# Altium PCB MotivPCB.PcbDoc
Units mil, origin at the board's own origin, x right, y up, seen from the top; angles counter-clockwise.
Board outline 994.28 x 797.43 mil, 2 copper layers (Top Layer, Bottom Layer); 10 components, 7 nets, 48 pads, 5 vias.
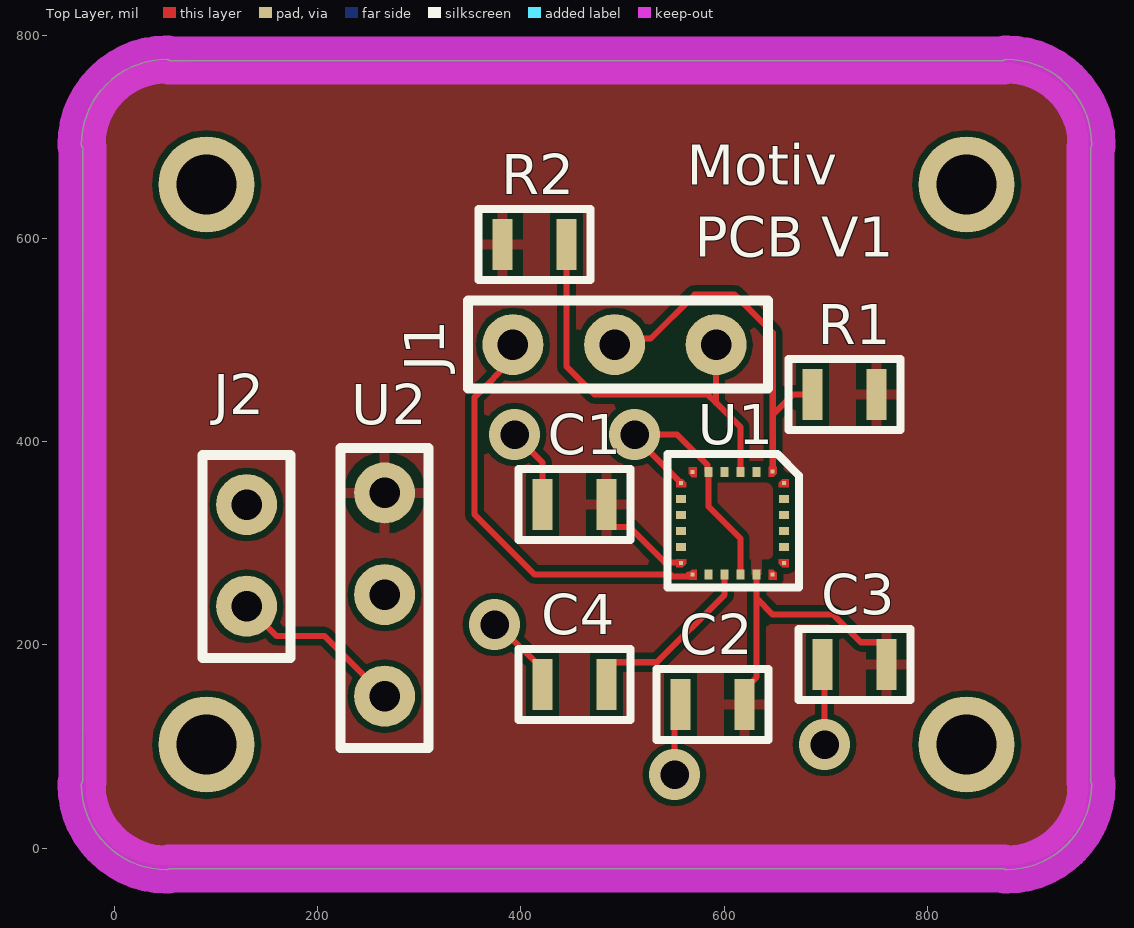
[diagram p0: Top Layer view]
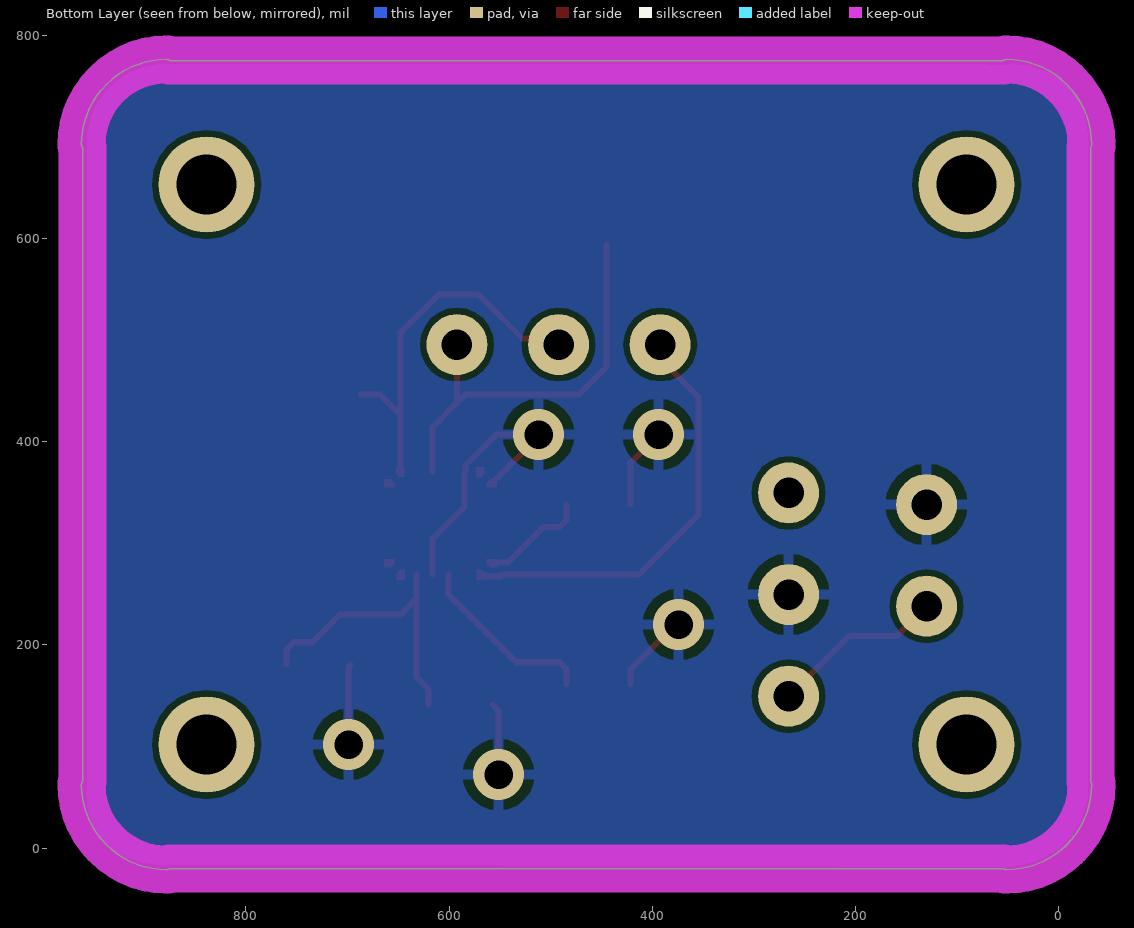
[diagram p1: Bottom Layer view, seen from below]

## Layer stack, top to bottom
Top Solder: solder mask 0.4, Solder Resist, Dk 3.5
Top Layer: signal copper 1.4
Dielectric 1: dielectric 12.6, FR-4, Dk 4.8
Bottom Layer: signal copper 1.4
Bottom Solder: solder mask 0.4, Solder Resist, Dk 3.5

## Board outline
-32.42,62.44 cw(c-27.41,62.44) -31.36,65.53 -31.36,689.28 cw(c-27.41,692.37) -32.42,692.37 cw(c51.33,692.37) 51.33,776.12 cw(c51.33,771.11) 54.42,775.06 875.02,775.06 cw(c878.1,771.11) 878.1,776.12 cw(c878.1,692.37) 961.86,692.37 cw(c956.84,692.37) 960.8,689.28 960.8,65.53 cw(c956.84,62.44) 961.86,62.44 cw(c878.1,62.44) 878.1,-21.31 cw(c878.1,-16.3) 875.02,-20.25 54.42,-20.25 cw(c51.33,-16.3) 51.33,-21.31 cw(c51.33,62.44)

## Design rules (kind name [scope] priority, off if disabled: settings)
Clearance [All] p1: gap=6 ignorepadtopadclearanceinfootprint=FALSE
HoleSize [All] p1: absolutevalues=TRUE maxlimit=3937.01 minlimit=15.75 maxpercent=80.000 minpercent=20.000
PolygonConnect [All] p1: connectstyle=Relief reliefconductorwidth=10 reliefentries=4 polygonreliefangle="90 Angle" airgapwidth=10
RoutingVias [All] p1: holewidth=15.75 width=31.5 viastyle="Through Hole" minholewidth=15.75 minwidth=23.62 maxholewidth=3937.01 maxwidth=3937.01
SilkToSilkClearance [All] p1: silktosilkclearance=0
SilkToSolderMaskClearance [IsPad] p1: minsilkscreentomaskgap=0 clearancetoexposedcopper=TRUE
SolderMaskExpansion [All] p1: expansion=4 istentingtop=FALSE
Width [All] p1: maxlimit=3937.01 minlimit=6 preferedwidth=6
27 further rules are at their usual default settings.

## Components (designator, comment, footprint, x,y, rotation, side; value= is the part's Value field where it differs from the comment)
C1 "100nF" "0805 Passive" 452.91,338.03 r0 top
C2 "100nF" "0805 Passive" 588.73,141.18 r0 top
C3 "470nF" "0805 Passive" 728.5,180.55 r0 top
C4 "1uF" "0805 Passive" 452.91,160.87 r0 top
J1 "Header-3" Header-3 592.28,495.51 r180 top
J2 "Header-2" Header-2 130.07,238.03 r90 top
R1 "4.7k Res" "0805 Passive" 718.65,446.3 r0 top
R2 "4.7k Res" "0805 Passive" 413.54,593.94 r0 top
U1 "IMU" BHI160b 659.01,359.1 r0 top
U2 "V_Reg 3V 0.5A" Header-3 265.9,149.45 r90 top

## Footprints (in the part's own frame and the unit in brackets; to place one, negate y for a bottom-side part, rotate by r counter-clockwise, add the part's x,y. Pads: shape width x height; smd on the part's side, far side on the other; paste and mask are expansions set on the pad)
"0805 Passive" [mm]
  rect 0.5x1.27 smd: 1(-0.8,0) 2(0.8,0)
  silkscreen extent -1.4,-0.89 1.4,0.89
BHI160b [mm]
  rect 0.1x0.1 smd paste+0 mask+0: 1(0,0) 24(-0.285,0.295)
  rect 0.25x0.2 smd paste+0 mask+0.03: 2(0,-0.4) 3(0,-0.8) 4(0,-1.2) 5(0,-1.6) 14(-2.57,-1.6) 15(-2.57,-1.2) 16(-2.57,-0.8) 17(-2.57,-0.4)
  rect 0.1x0.1 smd paste+0 mask+0.03: 6(0,-2) 7(-0.285,-2.285) 12(-2.285,-2.285) 13(-2.57,-2) 18(-2.57,0) 19(-2.285,0.285)
  rect 0.2x0.25 smd paste+0 mask+0.03: 8(-0.685,-2.285) 9(-1.085,-2.285) 10(-1.485,-2.285) 11(-1.885,-2.285) 20(-1.885,0.285) 21(-1.485,0.285) 22(-1.085,0.285) 23(-0.685,0.285)
  Top Layer region: -0.125,0.015 -0.045,0.095 0.125,0.095 0.125,-0.105 -0.125,-0.105
  Top Layer region: -0.18,0.24 -0.26,0.16 -0.38,0.16 -0.38,0.41 -0.18,0.41
  Top Layer region: -2.3,0.15 -2.38,0.23 -2.38,0.4 -2.18,0.4 -2.18,0.15
  Top Layer region: -2.525,0.095 -2.445,0.015 -2.445,-0.105 -2.695,-0.105 -2.695,0.095
  Top Layer region: -0.265,-2.16 -0.185,-2.24 -0.185,-2.41 -0.385,-2.41 -0.385,-2.16
  Top Layer region: -0.045,-2.1 -0.125,-2.02 -0.125,-1.9 0.125,-1.9 0.125,-2.1
  Top Layer region: -2.445,-2.02 -2.525,-2.1 -2.695,-2.1 -2.695,-1.9 -2.445,-1.9
  Top Layer region: -2.385,-2.24 -2.305,-2.16 -2.185,-2.16 -2.185,-2.41 -2.385,-2.41
  silkscreen extent -2.92,-2.61 0.37,0.73
Header-2 [mil]
  round 60 hole 30: 1(0,0) 2(100,0)
  silkscreen extent -51,-43 149,43
Header-3 [mil]
  round 60 hole 30: 1(0,0) 2(100,0) 3(200,0)
  silkscreen extent -51,-43 244,43

## Part data
J1: library part "Header 3-pin"
J2: library part "Header 2-pin"
U1: library part BHI160B
U2: library part V_Reg

## Free pads (board coordinates)
  round 94.49 hole 59.06: 1(90.7,653) 2(838.73,653) 3(838.73,101.81) 4(90.7,101.81)

## Via types
v1: diameter 50, hole 28, Top Layer to Bottom Layer, 5 vias

## Nets (pads, with @x,y where several pads share a name; then routed paths per layer and width w, separated by ;. In a path a pad name is that pad's centre, name@x,y a point inside that pad or via, vN(x,y) a via of type N, cw(c..) or ccw(c..) an arc to the next point about the centre after c; other vN are vias at no path point)
GND: C1.1 C2.1 C3.1 C4.1 J2.2 U1.9 U1.18 U1.20 U2.2 | length 584.2
  Top Layer w6: v1(374.17,219.92) 377.51,219.92 421.41,176.03 C4.1 ; v1(393.85,406.93) 421.41,379.37 C1.1 ; v1(551.33,72.29) 551.33,135.28 C2.1 ; U1.18 511.96,404.96 v1(511.96,406.93) 553.82,406.93 583.86,376.9 583.86,371.25 U1.20 584.8,335.94 616.29,304.45 U1.9 ; C3.1 698.97,178.59 v1(698.97,101.81)
INT: J1.3 U1.12 | length 423.4
  Top Layer w6: J1.3 392.28,481.63 354.48,443.83 354.48,328.19 413.54,269.14 547.46,269.14 549.18,267.42 563.33,267.42 565.04,269.14 U1.12
NetC4_0: C4.2 U1.10 | length 181.4
  Top Layer w6: C4.2 484.4,176.03 491.24,182.87 533.96,182.87 600.54,249.45 U1.10
NetJ2_1: J2.1 U2.1 | length 172.5
  Top Layer w6: J2.1 159.6,208.51 206.84,208.51 U2.1
SCK: J1.1 R2.2 U1.22 | length 417.3
  Top Layer w6: R2.2 445.03,473.86 472.59,446.3 584.08,446.3 592.28,438.11 ; J1.1 592.28,438.11 ; U1.22 616.29,414.09 592.28,438.11
SDA: J1.2 R1.1 U1.24 | length 375.5
  Top Layer w6: J1.2 498.23,501.47 527.76,501.47 571.02,544.73 610.39,544.73 647.99,507.13 647.99,426.62 ; U1.24 647.99,370.91 647.99,426.62 ; R1.1 667.67,446.3 647.99,426.62
VDD: C1.2 C2.2 C3.2 R1.2 R2.1 U1.8 U1.13 U2.3 | length 402.8
  Top Layer w6: C1.2 484.4,322.88 491.24,316.03 506.7,316.03 541.6,281.14 557.05,281.14 U1.13 ; C2.2 620.23,156.34 632.04,168.15 632.04,245.68 ; U1.8 632.04,245.68 ; C3.2 759.99,195.71 753.15,202.55 734.74,202.55 707.53,229.77 647.95,229.77 632.04,245.68
pads on no net: U1.1 U1.2 U1.3 U1.4 U1.5 U1.6 U1.7 U1.11 U1.14 U1.15 U1.16 U1.17 U1.19 U1.21 U1.23

## Polygon pours and split planes (outlines as drawn)
GND on Bottom Layer "GND_L02_P002" (solid, pour order 2): -28.37,57.89 ccw(c44.77,57.89) -8.71,7.99 ccw(c54.87,70.17) 53.89,-18.75 876.94,-16.23 ccw(c882.16,69.84) 939.3,5.26 ccw(c882.65,53.45) 956.78,59.43 956.78,692.59 ccw(c877.36,692.59) 933.51,748.76 ccw(c877.35,692.6) 877.35,772.03 72.88,772.03 69.05,771.04 53.89,771.04 ccw(c46.72,685.5) -8.71,751.05 ccw(c49.86,699.04) -28.37,695.2
VDD on Top Layer "VDD_L01_P001" (solid, pour order 1): -28.33,61.23 ccw(c51.1,61.23) -5.06,5.06 ccw(c46.35,56.48) 46.35,-16.23 881.28,-16.23 ccw(c881.28,63.2) 937.42,7.01 ccw(c888.32,56.11) 957.76,56.07 957.76,695.38 ccw(c885.06,695.38) 936.47,746.79 ccw(c873.16,683.46) 873.17,773.01 97.25,773.01 92.28,772.77 86.76,773.01 44.38,774.89 ccw(c50.26,693.21) -11.66,746.79 ccw(c50.38,693.56) -31.36,692.37

## Keep-outs
Keep-Out Layer:
  the board outline again, w47.24

## Silkscreen, mask and mechanical layers (free items; w line width, h text height)
Top Overlay:
  text "Motiv" at 563.14,653 h39.37
  text "PCB V1" at 571.02,582.13 h39.37